# Altium PCB RES-001 AutoHAT V2 SD Adapter Sub-Board - PCB.PcbDoc
Units mil, origin at the board's own origin, x right, y up, seen from the top; angles counter-clockwise.
Board outline 2086.61 x 787.4 mil, 4 copper layers (GTL, G1, GP1, GBL), stack 30.709 mil thick; 50 components, 45 nets, 229 pads, 73 vias.
Unrouted connection lines stored in the file: 1.
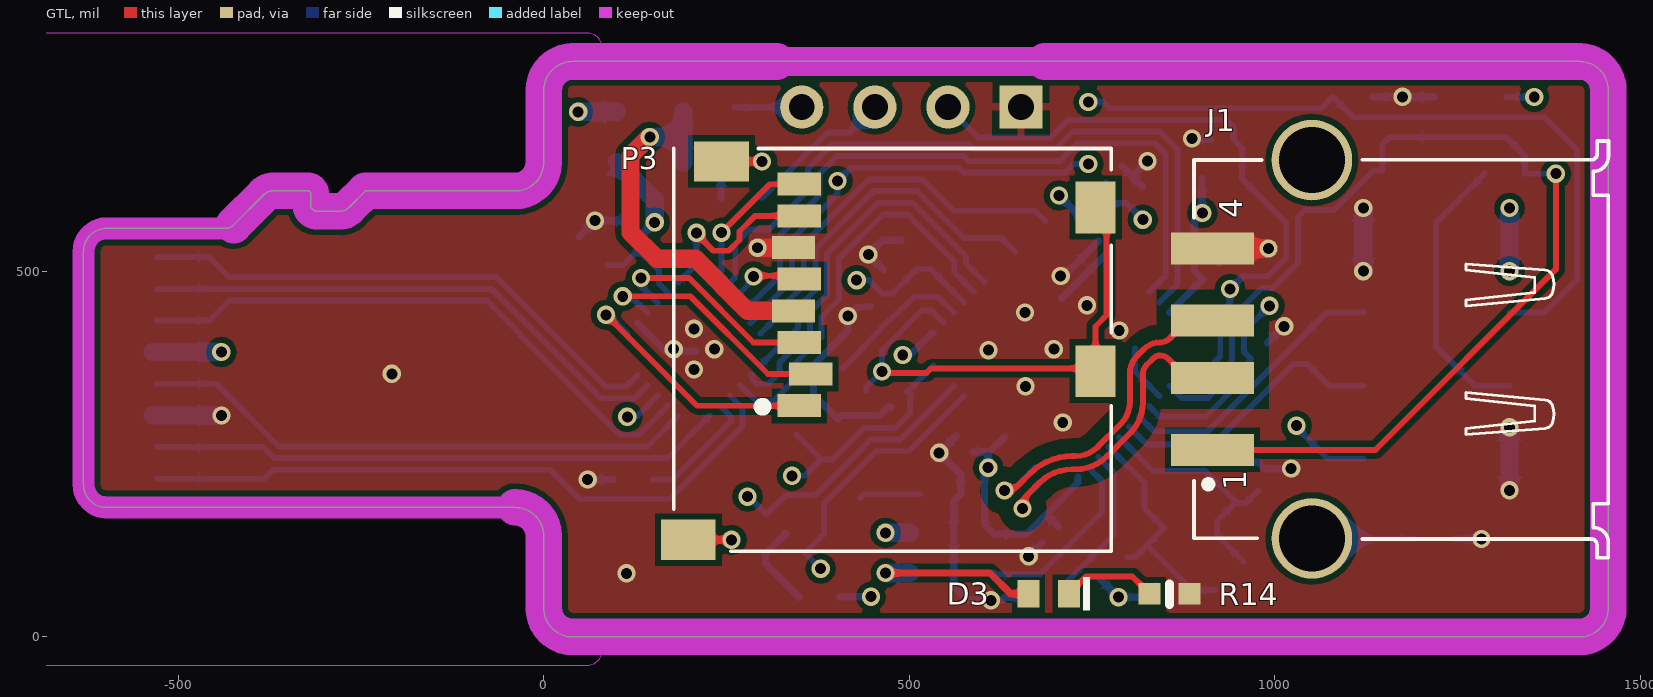
[diagram p0: GTL view]
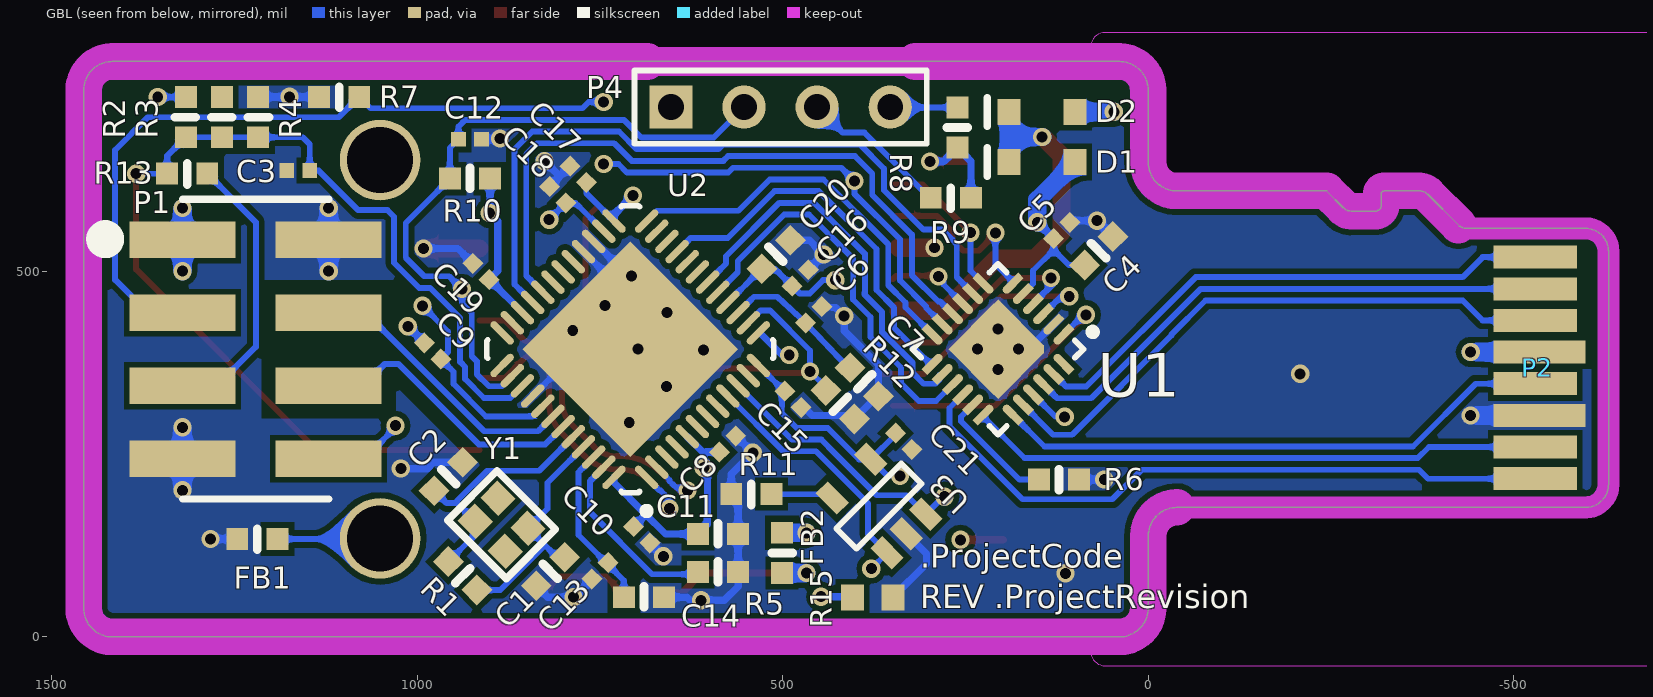
[diagram p1: GBL view, seen from below]
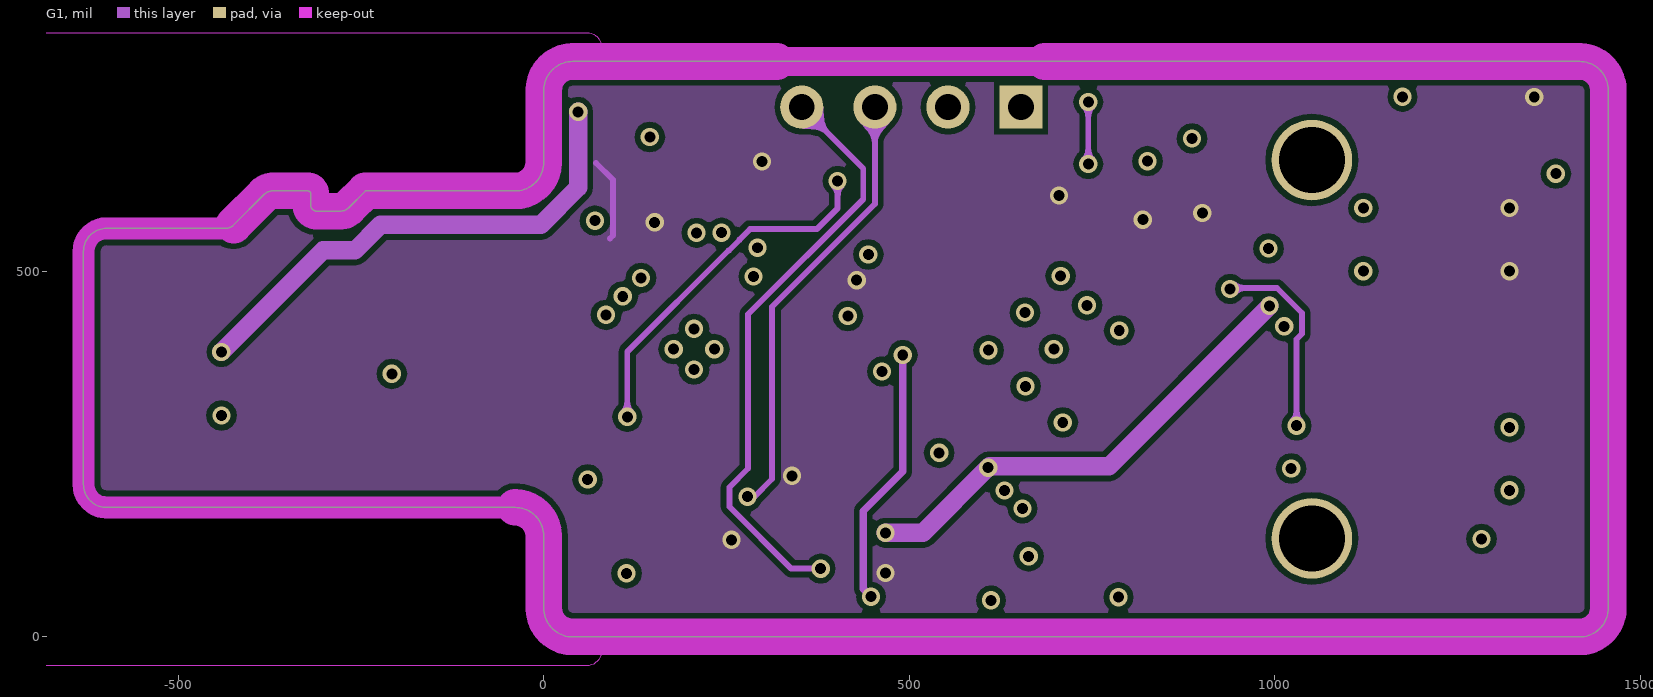
[diagram p2: G1]
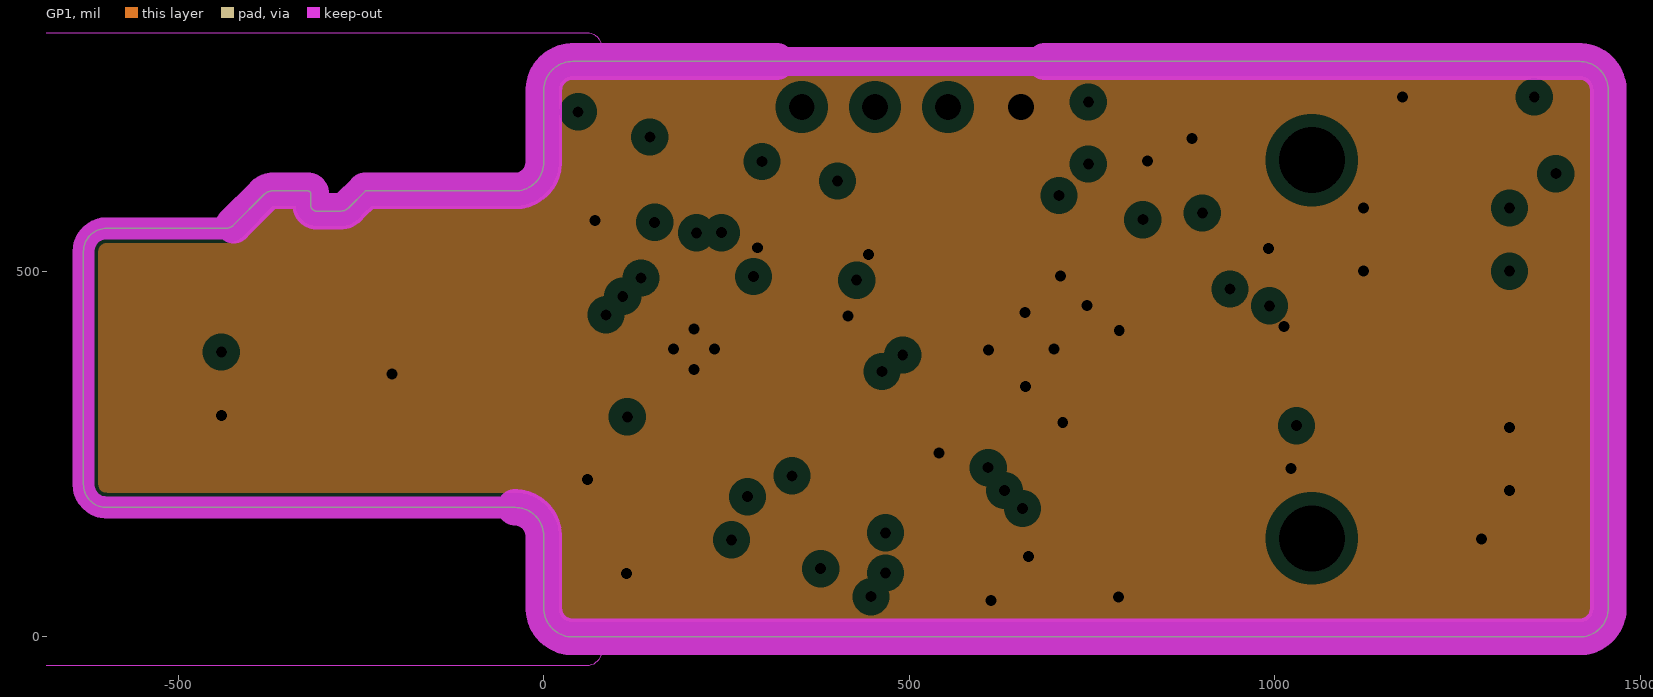
[diagram p3: GP1, clearances drawn from the general rule]
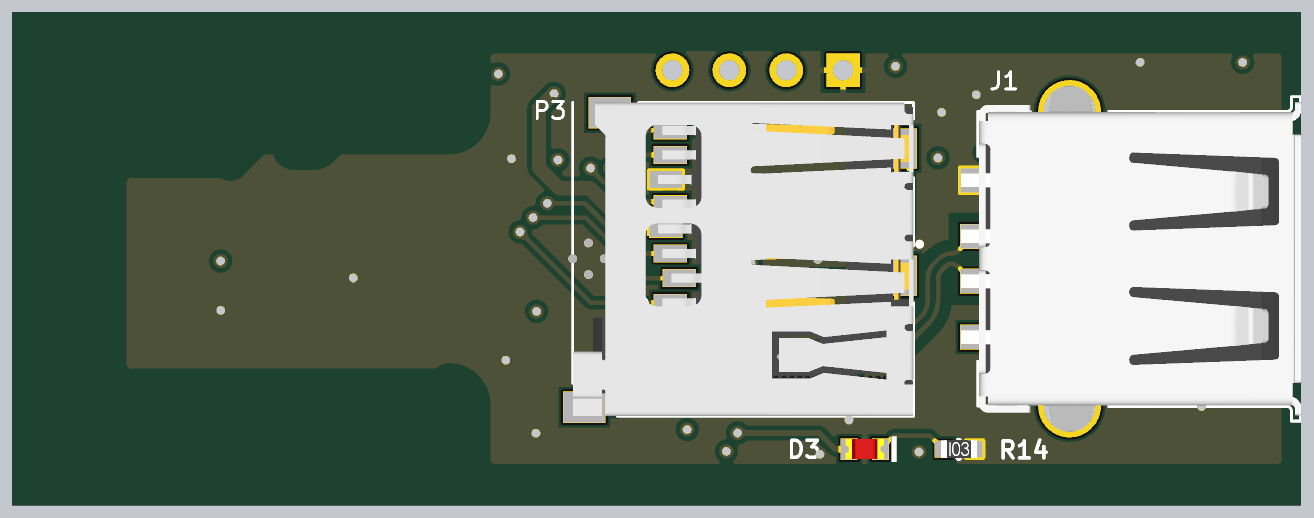
[diagram p4: 3D render of the assembled board from above, using the file's embedded part models]
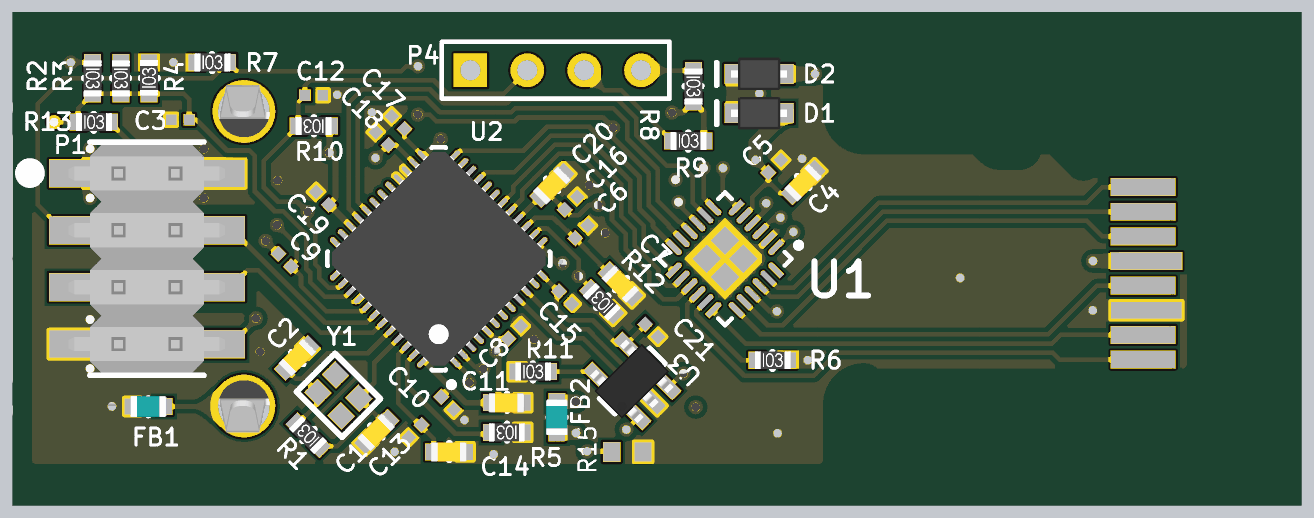
[diagram p5: 3D render of the assembled board from below, using the file's embedded part models]

## Layer stack, top to bottom
GTS: solder mask 0.3937, Solder Resist, Dk 3.5
GTL: signal copper 1.378
Dielectric 1: prepreg 4.7244, Prepreg, Dk 4.2
G1: signal copper 1.378
Dielectric 2: core 15.748, Prepreg, Dk 4.2
GP1: plane copper 1.378, net GND
Dielectric 3: prepreg 4.7244, FR-4, Dk 4.2
GBL: signal copper 1.378
GBS: solder mask 0.3937, Solder Resist, Dk 3.5

## Board outline
-598.43,177.17 cw(c-598.43,208.66) -629.92,208.66 -629.92,527.56 cw(c-598.43,527.56) -598.43,559.06 -435.66,559.06 -435.66,559.05 ccw(c-435.66,574.8) -424.53,563.66 -382.57,605.62 -382.57,605.63 cw(c-371.44,594.49) -371.44,610.24 -322.83,610.24 cw(c-322.83,606.3) -318.9,606.3 -318.9,590.55 ccw(c-311.02,590.55) -311.02,582.68 -278.19,582.68 -278.19,582.67 ccw(c-278.19,598.42) -267.05,587.28 -244.09,610.24 -39.37,610.24 ccw(c-39.37,649.61) 0,649.61 0,748.03 cw(c39.37,748.03) 39.37,787.4 1417.32,787.4 cw(c1417.32,748.03) 1456.69,748.03 1456.69,39.37 cw(c1417.32,39.37) 1417.32,0 39.37,0 cw(c39.37,39.37) 0,39.37 0,137.8 ccw(c-39.37,137.8) -39.37,177.17
cut-out: 1417.32,787.4
cut-out: -787.4,-39.37 cw(c-787.4,-19.69) -807.09,-19.69 cw(c-787.4,-19.69) -787.4,0 ccw(c-787.4,39.37) -748.03,39.37 -748.03,748.03 ccw(c-787.4,748.03) -787.4,787.4 cw(c-787.4,807.09) -807.09,807.09 cw(c-787.4,807.09) -787.4,826.77 59.06,826.77 cw(c59.06,807.09) 78.74,807.09 cw(c59.06,807.09) 59.06,787.4 39.37,787.4 ccw(c39.37,748.03) 0,748.03 0,649.61 cw(c-39.37,649.61) -39.37,610.24 -244.09,610.24 -267.05,587.28 cw(c-278.19,598.42) -278.19,582.67 -278.19,582.68 -311.02,582.68 cw(c-311.02,590.55) -318.9,590.55 -318.9,606.3 ccw(c-322.83,606.3) -322.83,610.24 -371.44,610.24 ccw(c-371.44,594.49) -382.57,605.63 -382.57,605.62 -424.53,563.66 cw(c-435.66,574.8) -435.66,559.05 -435.66,559.06 -598.43,559.06 ccw(c-598.43,527.56) -629.92,527.56 -629.92,208.66 ccw(c-598.43,208.66) -598.43,177.17 -39.37,177.17 cw(c-39.37,137.8) 0,137.8 0,39.37 ccw(c39.37,39.37) 39.37,0 59.06,0 cw(c59.06,-19.68) 78.74,-19.68 78.74,-19.69 cw(c59.06,-19.69) 59.06,-39.37

## Design rules (kind name [scope] priority, off if disabled: settings)
Clearance Clearance_1 [InNet('USBUP_D_P') or InNet('USBUP_D_N') or InNet('USBDN_D2_P') or InNet('USBDN_D2_N') vs InNet('GND')] p1: gap=8 ignorepadtopadclearanceinfootprint=FALSE except(0: Arc-Hole Track-Hole SMDPad-Hole THPad-Hole Via-Hole Fill-Hole Poly-Hole Region-Hole Text-Hole; 20: Arc-Poly Track-Poly SMDPad-Poly THPad-Poly Via-Poly Fill-Poly Poly-Poly)
Clearance [All] p2: gap=8 ignorepadtopadclearanceinfootprint=FALSE except(0: Arc-Hole Track-Hole SMDPad-Hole THPad-Hole Via-Hole Fill-Hole Poly-Hole Region-Hole Text-Hole)
DiffPairsRouting [All] p1: maxlimit=10 minlimit=10 mostfreqgap=10 toplayer_minwidth=8 toplayer_maxwidth=15 toplayer_prefwidth=10 midlayer1_minwidth=15 midlayer1_maxwidth=15 midlayer1_prefwidth=15 bottomlayer_minwidth=8 bottomlayer_maxwidth=15 bottomlayer_prefwidth=10 maxuncoupledlength=500
HoleSize [All] p1: absolutevalues=TRUE maxlimit=500 minlimit=15 maxpercent=80.000 minpercent=20.000
MinimumAnnularRing [All] p1: minimumring=5
MinimumSolderMaskSliver [All] p1: minsoldermaskwidth=2
PasteMaskExpansion [All] p1: expansion=-1
PlaneClearance [All] p1: clearance=18
PlaneConnect PlaneConnect_1 [IsPad and OnMultiLayer] p1: planeconnectstyle=Relief reliefexpansion=20 reliefentries=4 reliefconductorwidth=12 reliefairgap=10
PlaneConnect [All] p2: planeconnectstyle=Direct reliefexpansion=20 reliefentries=4 reliefconductorwidth=10 reliefairgap=10
PolygonConnect [All vs IsPad and OnMultiLayer] p1: connectstyle=Relief reliefconductorwidth=10 reliefentries=4 polygonreliefangle="90 Angle" airgapwidth=10
PolygonConnect PolygonConnect_1 [All] p2: connectstyle=Direct reliefconductorwidth=10 reliefentries=4 polygonreliefangle="90 Angle" airgapwidth=10
RoutingVias [All] p1: holewidth=15 width=25 viastyle="Through Hole" minholewidth=15 minwidth=25 maxholewidth=25 maxwidth=50
SilkToSilkClearance [All] p1 off: silktosilkclearance=1
SilkToSolderMaskClearance [IsPad] p1: minsilkscreentomaskgap=1 clearancetoexposedcopper=TRUE
SolderMaskExpansion [All] p1: expansion=4
Width [All] p1: maxlimit=500 minlimit=8 preferedwidth=10 midlayer1_maxwidth=100 minimp=50.000000 maximp=50.000000 favimp=50.000000
22 further rules are at their usual default settings.

## Classes and differential pairs
differential pair USBUP_D: +USBUP_D_P -USBUP_D_N
differential pair USBDN_D2: +USBDN_D2_P -USBDN_D2_N

## Components (designator, comment, footprint, x,y, rotation, side; value= is the part's Value field where it differs from the comment)
C1 "18pF" "0603C - HD" 817.91,89.57 r315 bottom
C2 "18pF" "0603C - HD" 957.68,219.49 r135 bottom
C3 "100nF" 0402 1163,638 r180 bottom
C4 "1µF" "0603C - HD" 67.61,528.29 r315 bottom
C5 "100nF" 0402 118.11,556.1 r315 bottom
C6 "100nF" 0402 457.68,440.94 r315 bottom
C7 "1µF" "0603C - HD" 388.46,348.76 r45 bottom
C8 "100nF" 0402 575.48,264.09 r315 bottom
C9 "100nF" 0402 979.12,391.33 r225 bottom
C10 "100nF" 0402 692.91,139.76 r45 bottom
C11 "4.7µF" "0603C - HD" 588.58,140.75 r0 bottom
C12 "100nF" 0402 928,681 r0 bottom
C13 "100nF" 0402 750,90.55 r135 bottom
C14 "1µF" "0603C - HD" 690,54.32 r0 bottom
C15 "100nF" 0402 486,325.32 r45 bottom
C16 "100nF" 0402 476,491.32 r315 bottom
C17 "100nF" 0402 780,633 r225 bottom
C18 "100nF" 0402 808,605 r225 bottom
C19 "100nF" 0402 913,500 r225 bottom
C20 "4.7µF" "0603C - HD" 509,523.32 r315 bottom
C21 "100nF" 0402 334.44,267.77 r45 bottom
D1 "CUS08F30,H3F" USC 145.32,649.61 r0 bottom
D2 "CUS08F30,H3F" USC 145.32,718.5 r0 bottom
D3 "" "0603LED - HD" 690.94,59.06 r0 top value="Green LED"
FB1 "300mA" "0603L - HD" 1219,134 r180 bottom
FB2 "2A 0.05 DCR" "0603L - HD" 501,115 r90 bottom
J1 "WE-Communication Connectors 62900416021" 62900416021 1456.69,394.68 r90 top locked
P1 "15-91-0080" 15-91-0080 1221.46,393.7 r270 bottom locked
P2 "SD Card Adapter Connector" "SD Card" -529.53,368.11 r270 bottom locked
P3 "Wurth MicroSD" 693071010811 476.38,391.73 r90 top locked value=693071010811
P4 "Header 4" HDR1X4 653,725 r180 bottom locked
R1 "1M" "0603R - HD" 937.99,83.66 r45 bottom
R2 "825R" "0603R - HD" 1316.89,711.24 r270 bottom
R3 "39.2k" "0603R - HD" 1267.43,711.24 r270 bottom
R4 "61.9k" "0603R - HD" 1217.81,711.24 r90 bottom
R5 "12k" "0603R - HD" 588.58,88.58 r0 bottom
R6 "10k" "0603R - HD" 122,215.32 r180 bottom
R7 "10k" "0603R - HD" 1107,739 r180 bottom
R8 "2k" "0603R - HD" 261,697 r270 bottom
R9 "2k" "0603R - HD" 270,601 r180 bottom
R10 "10k" "0603R - HD" 928,627 r0 bottom
R11 "10k" "0603R - HD" 543,195.32 r180 bottom
R12 "10k" "0603R - HD" 421.46,317.76 r45 bottom
R13 "0R" "0603R - HD" 1315,634 r180 bottom
R14 "470R" "0603R - HD" 856.3,59.09 r0 top
R15 "10k" 1608[0603] 376.97,54.13 r180 bottom
U1 "TS3A27518ERTWR" QFN-24 205.43,393.7 r315 bottom
U2 "USB2642-I/ML" QFN48 708.66,393.7 r45 bottom locked
U3 "FT24C04A-ULR-T" SOT-23-5 368.46,178.96 r45 bottom
Y1 "24MHz" "XTAL - 2 x 1.6" 884.84,153.54 r45 bottom

## Footprints (in the part's own frame and the unit in brackets; to place one, negate y for a bottom-side part, rotate by r counter-clockwise, add the part's x,y. Pads: shape width x height; smd on the part's side, far side on the other; paste and mask are expansions set on the pad)
15-91-0080 [mil]
  rect 50x145 smd: 1(-150,-100) 2(-150,100) 3(-50,-100) 4(-50,100) 5(50,-100) 6(50,100) 7(150,-100) 8(150,100)
  silkscreen extent -205,-216 205,100, body extent -200,-137 200,138, height 379
0402 [mm] "Chip Capacitor, Body 1.0x0.5mm, Height 0.6mm, IPC High Density"
  rect 0.52x0.52 smd: 1(-0.4,0) 2(0.4,0)
  body extent -0.55,-0.3 0.55,0.3, height 0.6
"0603C - HD" [mil] "Capacitor 0603 [Imperial]"
  rect 30x30 smd: 1(-27.5,0) 2(27.5,0)
  silkscreen extent 0,-15 0,14, body extent -31,-17 32,17, height 31
"0603L - HD" [mil] "Inductor 0603 [Imperial]"
  rect 30x30 smd: 1(-27.5,0) 2(27.5,0)
  silkscreen extent 0,-15 0,14, body extent -31,-19 31,19, height 31
"0603LED - HD" [mil] "LED 0603 [Imperial]"
  rect 30x38 smd: 1(-27.5,0) 2(27.5,0)
  silkscreen extent 47,-23 56,23, body extent -33,-18 33,18, height 35
"0603R - HD" [mil] "Resistor 0603 [Imperial]"
  rect 30x30 smd: 1(-27.5,0) 2(27.5,0)
  silkscreen extent 0,-15 0,14, body extent -31,-16 32,16, height 18
1608[0603] [mm] "Chip Capacitor, Body 1.6x0.8mm, IPC High Density"
  rect 0.8x0.9 smd: 1(-0.7,0) 2(0.7,0)
  body extent -0.87,-0.48 0.87,0.48, height 1.3
62900416021 [mm] "4 pins"
  rect 1.12x2.88 smd: 1(-3.525,13.755) 2(-1.025,13.755) 3(0.975,13.755) 4(3.475,13.755)
  round 2.8 hole 2.3: Z1(-6.6,10.305) Z2(6.55,10.305)
  silkscreen extent -7.28,0 7.21,14.4, body extent -7.77,-0.05 7.72,15.16, height 7.5
693071010811 [mm] "WR-CRD Micro SD_Push and Push_Card Detection_8 pins"
  rect 0.8x1.5 smd: 1(-1.915,3.225) 2(-0.815,2.825) 3(0.285,3.225) 4(1.385,3.425) 5(2.485,3.225) 6(3.585,3.425) 7(4.685,3.225) 8(5.785,3.225)
  rect 1.4x1.9 smd: 9(-6.575,7.075) 9(6.575,5.925)
  rect 1.8x1.4 smd: 10(-0.715,-7.075) 10(4.975,-7.075)
  silkscreen extent -6.98,-7.62 7.03,7.59, body extent -6.97,-7.63 7.03,7.58, height 1.84
HDR1X4 [mm] "Connector; Header; 4 Position"
  rect 1.5x1.5 hole 0.9: 1(0,0)
  round 1.5 hole 0.9: 2(2.54,0) 3(5.08,0) 4(7.62,0)
  silkscreen extent -1.27,-1.27 8.89,1.27
QFN48 [mm]
  oval 1.05x0.25 smd paste-0.025 mask+0.1: 1(-3.55,2.75) 2(-3.55,2.25) 3(-3.55,1.75) 4(-3.55,1.25) 5(-3.55,0.75) 6(-3.55,0.25) 7(-3.55,-0.25) 8(-3.55,-0.75) 9(-3.55,-1.25) 10(-3.55,-1.75) 11(-3.55,-2.25) 12(-3.55,-2.75) 25(3.55,-2.75) 26(3.55,-2.25) 27(3.55,-1.75) 28(3.55,-1.25) 29(3.55,-0.75) 30(3.55,-0.25) 31(3.55,0.25) 32(3.55,0.75) 33(3.55,1.25) 34(3.55,1.75) 35(3.55,2.25) 36(3.55,2.75)
  oval 0.25x1.05 smd paste-0.025 mask+0.1: 13(-2.75,-3.55) 14(-2.25,-3.55) 15(-1.75,-3.55) 16(-1.25,-3.55) 17(-0.75,-3.55) 18(-0.25,-3.55) 19(0.25,-3.55) 20(0.75,-3.55) 21(1.25,-3.55) 22(1.75,-3.55) 23(2.25,-3.55) 24(2.75,-3.55) 37(2.75,3.55) 38(2.25,3.55) 39(1.75,3.55) 40(1.25,3.55) 41(0.75,3.55) 42(0.25,3.55) 43(-0.25,3.55) 44(-0.75,3.55) 45(-1.25,3.55) 46(-1.75,3.55) 47(-2.25,3.55) 48(-2.75,3.55)
  rect 5.3x5.3 smd paste-10: PAD(0,0)
  silkscreen extent -4.5,-3.72 3.72,3.73, body extent -3.62,-3.63 3.63,3.63, height 1
QFN-24 [mm]
  rect 0.282x0.282 smd rot 45 paste-10 mask+0: 0(-1.026,1.026)
  rect 2.45x2.25 smd paste-10 mask+0: 0(0,-0.1)
  rect 2.25x2.45 smd paste-10 mask+0: 0(0.1,0)
  rect 0.7x0.28 smd paste-0.025 mask+0.08: 1(-2.025,1.25) 2(-2.025,0.75) 3(-2.025,0.25) 4(-2.025,-0.25) 5(-2.025,-0.75) 6(-2.025,-1.25) 13(2.025,-1.25) 14(2.025,-0.75) 15(2.025,-0.25) 16(2.025,0.25) 17(2.025,0.75) 18(2.025,1.25)
  round 0.28 smd mask+0.08: 1(-1.675,1.25) 2(-1.675,0.75) 3(-1.675,0.25) 4(-1.675,-0.25) 5(-1.675,-0.75) 6(-1.675,-1.25) 7(-1.25,-1.675) 8(-0.75,-1.675) 9(-0.25,-1.675) 10(0.25,-1.675) 11(0.75,-1.675) 12(1.25,-1.675) 13(1.675,-1.25) 14(1.675,-0.75) 15(1.675,-0.25) 16(1.675,0.25) 17(1.675,0.75) 18(1.675,1.25) 19(1.25,1.675) 20(0.75,1.675) 21(0.25,1.675) 22(-0.25,1.675) 23(-0.75,1.675) 24(-1.25,1.675)
  rect 0.28x0.7 smd paste-0.025 mask+0.08: 7(-1.25,-2.025) 8(-0.75,-2.025) 9(-0.25,-2.025) 10(0.25,-2.025) 11(0.75,-2.025) 12(1.25,-2.025) 19(1.25,2.025) 20(0.75,2.025) 21(0.25,2.025) 22(-0.25,2.025) 23(-0.75,2.025) 24(-1.25,2.025)
  silkscreen extent -2.85,-2.1 2.1,2.1, body extent -1.1,-3 2.9,1, height 0.9
"SD Card" [mm]
  rect 0.8x2.9 smd: 1(-3.85,0) 2(-2.75,0) 3(-1.65,0) 5(0.55,0) 7(2.75,0) 8(3.85,0)
  rect 0.8x3.2 smd: 4(-0.55,0.15) 6(1.65,0.15)
SOT-23-5 [mm]
  rect 1.05x0.6 smd: 1(-1.35,0.95) 2(-1.35,0) 3(-1.35,-0.95) 4(1.35,-0.95) 5(1.35,0.95)
  silkscreen extent -0.5,-1.6 0.5,1.6, body extent -1.5,-1.47 1.5,1.53, height 1.45
USC [mm]
  rect 0.8x0.9 smd: 1(-1.15,0) 2(1.15,0)
  silkscreen extent 1.9,-0.5 1.9,0.5, body extent -1.25,-0.73 1.25,0.72, height 1.1
"XTAL - 2 x 1.6" [mm]
  rect 0.9x0.85 smd: 1(-0.737,-0.562) 2(-0.737,0.562) 2(0.738,-0.562) 3(0.738,0.563)
  silkscreen extent -1.44,-1.21 1.44,1.21, body extent -1.01,-0.81 0.99,0.79, height 0.7

## Part data
C1 C2: library part WARDIND3.S01_1uF_14, "18pF ±5% 100V Ceramic Capacitor C0G, NP0 0603 (1608 Metric)", Manufacturer="Samsung Electro-Mechanics America, Inc", Manufacturer Part No.=CL10C180JC8NNNC, Package=0603, Rating=100V, Supplier Part No.=1276-2210-1-ND, Checked=YES, Checked_Date=2017.06.26, Cost_1=0.10000, Cost_100=0.02460, Cost_1000=0.01353, Load=YES, Mount=SMT, Supplier=Digi-Key
C3 C5 C6 C8 C9 C10 C12 C13 C15 C16 C17 C18 C19 C21: library part Cap, "0.10µF 16V Ceramic Capacitor X7R 0402 (1005 Metric) 0.039\" L x 0.020\" W (1.00mm x 0.50mm)", Manufacturer="Samsung Electro-Mechanics America, Inc", Manufacturer Part No.=CL05B104KO5NNNC, Package=0402, Rating=16V, Supplier Part No.=1276-1001-1-ND, Checked=YES, Checked_Date=2017.06.26, Cost_1=0.10000, Cost_100=0.00500, Cost_1000=0.00308, Load=YES, Mount=SMT, Supplier=Digi-Key
C4 C7 C14: library part Cap, "1µF 10V Ceramic Capacitor X7R 0603 (1608 Metric) 0.063\" L x 0.031\" W (1.60mm x 0.80mm)", Manufacturer="Samsung Electro-Mechanics America, Inc", Manufacturer Part No.=CL10B105KP8NNNC, Package=0603, Rating=10V, Supplier Part No.=1276-1946-1-ND, Checked=YES, Checked_Date=2017.06.26, Cost_1=0.10000, Cost_100=0.01870, Cost_1000=0.01070, Mount=SMT, Supplier=Digi-Key
  C4: Load=DNP
  C7 C14: Load=YES
C11 C20: library part Cap, "4.7µF 10V Ceramic Capacitor X5R 0603 (1608 Metric) 0.063\" L x 0.031\" W (1.60mm x 0.80mm)", Manufacturer="Samsung Electro-Mechanics America, Inc", Manufacturer Part No.=CL10A475KP8NNNC, Package=0603, Rating=10V, Supplier Part No.=1276-1044-1-ND, Checked=YES, Checked_Date=2017.06.26, Cost_1=0.12000, Cost_100=0.04320, Cost_1000=0.02756, Load=YES, Mount=SMT, Supplier=Digi-Key
D1 D2: library part "D Schottky", "Schottky Diode", Manufacturer="Toshiba Semiconductor and Storage", Rating=800mA, Supplier Part No.=CUS08F30H3FCT-ND, Cost_1=0.37000, Cost_100=0.18900, Load=YES, Manufacturer Part No.=CUS08F30,H3F, Mount=SMT, Supplier=Digi-Key
D3: library part LED1, "Green 571nm LED Indication - Discrete 2V 0603 (1608 Metric)", Manufacturer="Lite-On Inc.", Manufacturer Part No.=LTST-C190KGKT, Package=0603, Rating="25mA DC", Supplier Part No.=160-1435-1-ND, Checked=YES, Checked_Date=2017.06.23, Cost_1=0.28000, Cost_100=0.10750, Cost_1000=0.05054, Load=YES, Mount=SMT, Supplier=Digi-Key
FB1: library part Inductor, "470 Ohm 1 Ferrite Bead 0603 (1608 Metric) 300mA 350 mOhm Max DCR", Manufacturer="Samsung Electro-Mechanics America, Inc", Manufacturer Part No.=CIM10J471NC, Package=0603, Supplier Part No.=1276-6380-1-ND, Checked=YES, Checked_Date=2017.06.26, Cost_1=0.10000, Cost_100=0.02940, Cost_1000=0.01108, Load=YES, Mount=SMT, Rating=300mA, Supplier=Digi-Key
FB2: library part Inductor, "Inductor", Manufacturer="TDK Corporation", Manufacturer Part No.=MPZ1608S181ATAH0, Package=0603, Supplier Part No.=445-5220-1-ND, Checked=YES, Checked_Date=2017.06.26, Cost_1=0.10000, Cost_100=0.04720, Cost_1000=0.02826, Load=YES, Mount=SMT, Rating="2A 0.05 DCR", Supplier=Digi-Key
J1: "WR-COM USB SMT Type A", Manufacturer="W¨¹rth Elektronik eiSos GmbH", Manufacturer Part No.=62900416021, Supplier Part No.=732-3181-ND, Checked=YES, Checked_Date=2017.06.26, Cost_1=2.63000, Cost_100=2.21330, Cost_1000=1.84503, Load=YES, Mount=SMT, Supplier=Digi-Key
P1: library part "Header 4X2", "Header, 4-Pin, Dual row", Manufacturer="Molex, LLC", Supplier Part No.=WM17458-ND, Cost_1=0.77000, Cost_100=0.58500, Cost_1000=0.42548, Load=YES, Manufacturer Part No.=15-91-0080, Mount=SMT, Supplier=Digi-Key
P3: library part "Molex MicroSD", Manufacturer=Wurth, Manufacturer Part No.=693071010811, Checked=YES, Checked_Date=2017.06.26, Load=YES, Mount=SMT, Supplier=Wurth, Supplier Part No.=693071010811
P4: "Header, 4-Pin"
R1: library part Res1, "RES SMD 1M OHM 5% 1/10W 0603", Manufacturer="Samsung Electro-Mechanics America, Inc", Manufacturer Part No.=RC1608J105CS, Package=0603, Rating=0.1W, Supplier Part No.=1276-5134-1-ND, Checked=YES, Checked_Date=2017.06.26, Cost_1=0.10000, Cost_100=0.00600, Cost_1000=0.00391, Load=YES, Mount=SMT, Supplier=Digi-Key
R2: library part Res1, "825 Ohm ±1% 0.1W, 1/10W Chip Resistor 0603 (1608 Metric) Moisture Resistant Thick Film", Manufacturer=Yageo, Manufacturer Part No.=RC0603FR-07825RL, Package=0603, Rating="1% 0.1W", Supplier Part No.=311-825HRCT-ND, Checked=YES, Checked_Date=2017.06.26, Cost_1=0.11000, Cost_100=0.00670, Cost_1000=0.00298, Load=DNP, Mount=SMT, Precision=1%, Supplier=Digi-Key
R3: library part Res1, "39.2k Ohm ±1% 0.1W, 1/10W Chip Resistor 0603 (1608 Metric) Moisture Resistant Thick Film", Manufacturer=Yageo, Manufacturer Part No.=RC0603FR-0739K2L, Package=0603, Rating="1% 0.1W", Supplier Part No.=311-39.2KHRCT-ND, Checked=YES, Checked_Date=2017.06.26, Cost_1=0.11000, Cost_100=0.00670, Cost_1000=0.00298, Load=DNP, Mount=SMT, Precision=1%, Supplier=Digi-Key
R4: library part Res1, "39.2k Ohm ±1% 0.1W, 1/10W Chip Resistor 0603 (1608 Metric) Moisture Resistant Thick Film", Manufacturer=Yageo, Manufacturer Part No.=RC0603FR-0761K9L, Package=0603, Rating="1% 0.1W", Supplier Part No.=311-61.9KHRCT-ND, Checked=YES, Checked_Date=2017.06.26, Cost_1=0.11000, Cost_100=0.00670, Cost_1000=0.00298, Load=YES, Mount=SMT, Precision=1%, Supplier=Digi-Key
R5: library part Res1, "12k Ohm ±1% 0.1W, 1/10W Chip Resistor 0603 (1608 Metric) Moisture Resistant Thick Film", Manufacturer=Yageo, Manufacturer Part No.=RC0603FR-0712KL, Package=0603, Rating="1% 0.1W", Supplier Part No.=311-12.0KHRTR-ND, Checked=YES, Checked_Date=2017.06.22, Cost_1=0.11000, Cost_100=0.00670, Cost_1000=0.00298, Load=YES, Mount=SMT, Precision=1%, Supplier=Digi-Key
R6 R7 R10 R11 R12 R15: library part Res1, "RES SMD 10K OHM 5% 1/10W 0603", Manufacturer="Samsung Electro-Mechanics America, Inc", Manufacturer Part No.=RC1608J103CS, Package=0603, Rating=0.1W, Supplier Part No.=1276-5086-1-ND, Checked=YES, Checked_Date=2017.06.26, Cost_1=0.13000, Cost_100=0.01210, Cost_1000=0.00391, Load=YES, Mount=SMT, Supplier=Digi-Key
R8 R9: library part Res1, "RES SMD 2K OHM 5% 1/10W 0603", Manufacturer=Yageo, Manufacturer Part No.=RC0603JR-072KL, Package=0603, Rating=0.1W, Supplier Part No.=311-2.0KGRCT-ND, Checked=YES, Checked_Date=2017.06.26, Cost_1=0.10000, Cost_100=0.00420, Load=YES, Mount=SMT, Supplier=Digi-Key
R13: library part Res1, "RES SMD 0 OHM JUMPER", Manufacturer="Samsung Electro-Mechanics America, Inc", Manufacturer Part No.=RC1608J000CS, Package=0603, Rating=0.1W, Supplier Part No.=1276-3510-1-ND, Checked=YES, Checked_Date=2017.06.23, Cost_1=0.10000, Cost_100=0.00440, Cost_1000=0.00322, Load=YES, Mount=SMT, Supplier=Digi-Key
R14: library part Res1, "RES SMD 470 OHM 5% 1/10W 0603", Manufacturer="Samsung Electro-Mechanics America, Inc", Manufacturer Part No.=RC1608J471CS, Package=0603, Rating=0.1W, Supplier Part No.=1276-5054-1-ND, Checked=YES, Checked_Date=2017.06.23, Cost_1=0.10000, Cost_100=0.00460, Cost_1000=0.00391, Load=YES, Mount=SMT, Supplier=Digi-Key
U1: library part TS3A27518E, "IC MUX/DEMUX 6X1 24WQFN", Manufacturer="Texas Instruments", Package=24-WQFN, Supplier Part No.=296-25415-1-ND, Cost_1=2.56000, Cost_100=1.84820, Cost_1000=1.25813, Load=YES, Manufacturer Part No.=TS3A27518ERTWR, Mount=SMT, Supplier=Digi-Key
U2: library part USB2642, "IC FLASH MEDIA CTLR USB2 48VQFN", Manufacturer="Microchip Technology", Package=48-QFN, Supplier Part No.=USB2642-I/ML-ND, Checked=YES, Checked_Date=2017.06.26, Cost_1=5.09000, Cost_100=4.09740, Load=YES, Manufacturer Part No.=USB2642-I/ML, Mount=SMT, Supplier=Digi-Key
U3: "EEPROM Memory IC 4Kb (512 x 8) I²C 550ns SOT-23-5", Manufacturer="Fremont Micro Devices USA", Package=SOT-23-5, Supplier Part No.=1219-1066-1-ND, Checked=YES, Checked_Date=2017.06.26, Cost_1=0.48000, Cost_100=0.30500, Cost_1000=0.18184, Load=YES, Manufacturer Part No.=FT24C04A-ULR-T, Mount=SMT, Supplier=Digi-Key
Y1: library part XTAL, "24MHz ±20ppm Crystal 6pF 150 Ohm -30°C ~ 85°C Surface Mount 4-SMD, No Lead", Manufacturer="Murata Electronics North America", Manufacturer Part No.=XRCGB24M000F2P00R0, Supplier Part No.=490-9762-1-ND, Checked=YES, Checked_Date=2017.06.26, Cost_1=0.42000, Cost_100=0.27800, Cost_1000=0.22239, Load=YES, Mount=SMT, Supplier=Digi-Key

## Via types
v1: diameter 25, hole 15, GTL to GBL, tented both sides, 72 vias
v2: diameter 25, hole 15, GTL to GBL, 1 vias

## Nets (pads, with @x,y where several pads share a name; then routed paths per layer and width w, separated by ;. In a path a pad name is that pad's centre, name@x,y a point inside that pad or via, vN(x,y) a via of type N, cw(c..) or ccw(c..) an arc to the next point about the centre after c; other vN are vias at no path point)
A3V3: C8.2 C9.2 C10.2 C11.2 FB2.2 U2.5 U2.41 U2.48 | length 1312.8
  G1 w25: v1(467.5,142.5) 518.93,142.5 v1(608,231.57) 609.92,233.49 773.49,233.49 v1(993,453)
  GBL w8: U2.41 842.51,301.61 906,301.61 950.64,346.26 950.64,362.86 C9.2 958,390.18 958,418 v1(993,453)
  GBL w10: C8.2 609.67,252.95 U2.5 ; 608,251.28 v1(608,231.57) 603,226.57 603,153.83 C11.2 660.43,140.75 687.99,168.31 ; C10.2 687.99,166.96 687.99,168.31 ; U2.48 730.93,211.25 687.99,168.31
  GBL w25: v1(467.5,142.5) FB2.2
D1V8: C6.2 C7.2 U2.15 | length 202.6
  GBL w8: C7.2 410.16,368.2 C6.2 507.54,465.58 539.35,465.58 U2.15
D3V3: C4.2 C5.2 C15.2 C16.2 C17.2 C18.2 C19.2 C20.2 C21.2 D1.1 D3.1 FB2.1 P1.1 P3.9 R2.1 R8.2 R9.2 R10.1 U1.5 U2.12 U2.16 U2.25 U2.26 U2.34 U3.4 | length 1933.4
  GTL w10: P3.9@197.84,132.87 v1(256.87,132.87) ; P3.9@243.11,650.59 v1(298.41,650.59) ; v1(467.5,87.5) 610.56,87.5 639.01,59.06 D3.1
  G1 w8: 71.5,648.58 94.5,625.57 94.5,549.22 90.55,545.28
  GBL w8: C4.2 108.51,508.85 129.25,529.59 ; v1(151.59,567.32) C5.2 129.25,529.59 ; U1.5@169.93,470.95 157.55,483.34 157.55,501.28 129.25,529.59 ; v1(339.44,220.46) 357.06,220.46 U3.4 ; C21.2@345.58,277.01 U3.4 ; v1(428.15,488.19) 444.81,488.19 463,470 476.96,470 C16.2 510.83,503.87 C20.2 528.9,503.87 U2.16 ; U2.12 498.3,336.45 C15.2 501.34,332.25 501.34,306.44 480.89,285.99 438.55,285.99 395.55,242.99 U3.4 ; U2.25 736.85,575 768.86,607.02 C17.2 ; U2.26 783.55,593.86 C18.2 v1(819.73,571) ; R2.1 v1(1355.26,738.74)
  GBL w10: R9.2 242.5,651 R8.2 279.91,650.59 v1(298.41,650.59) ; v1(705,604) 734,575 U2.25@736.85,575 ; U2.34 901.26,488.86 C19.2 890,500.73 890,569 v1(901,580) 900.5,580.5 R10.1
  GBL w25: D1.1 151.59,598.06 v1(151.59,567.32) ; v1(467.5,87.5) FB2.1 ; v1(1321.46,500.55) P1.1 v1(1321.46,586.86)
DUT_VOLTAGE: D2.1 P2.4 | length 832.3
  G1 w25: v1(-441.24,389.76) -302,529 -258.4,529 -223.4,564 -3.92,564 47,614.91 v1(47,718.5)
  GBL w25: P2.4 v1(-441.24,389.76) ; v1(47,718.5) D2.1
GND: C1.2 C2.2 C3.1 C4.1 C5.1 C6.1 C7.1 C8.1 C9.1 C10.1 C11.1 C12.1 C13.1 C14.1 C15.1 C16.1 C17.1 C18.1 C19.1 C20.1 C21.1 FB1.1 J1.4 P1.2 P1.7 P2.6 P3.6 P4.1 R4.2 R5.1 R6.2 R7.1 R11.1 R12.1 R14.2 R15.2 U1.0 U1.2 U2.27 U2.28 U2.40 U2.PAD U3.2 | length 2197.6
  GTL w10: v1@610,52 v1(612,50)
  GTL w25: v1(292.34,532.51) 341.17,532.51 P3.6 ; J1.4 v1(991.5,531.5)
  GBL w8: U2.PAD@808.88,395.09 808.88,363.08 U2.40
  GBL w10: C4.1 v1(70,569.58) 104.64,569.58 C5.1 ; v1(60,215.32) R6.2 ; U1.2@128.18,429.2 166.46,390.92 U1.0@208.22,390.92 ; U3.2@330,142.32 U3.2@330.83,142.32 ; U3.2 303.27,113.77 303.27,100.27 R15.2 ; C7.1 369.01,371.96 416,418.95 v1(416,439) 427.45,450.45 C6.1 ; C7.1@371.01,329.31 R12.1 406.69,302.99 459.48,302.99 470.68,314.18 C15.1 ; C16.1 v1(444,523.32) 463.45,542.76 C20.1 ; C8.1 v1(541,251.88) 570.5,222.38 R11.1 561.08,185.9 C11.1 R5.1 561.08,68.92 580,50 v1(612,50) 627,50 631.32,54.32 C14.1 ; v1(663.39,110.24) C10.1 ; U2.PAD@708.66,463.3 U2.28 ; U2.PAD@708.66,491.14 U2.27 ; C13.1 v1(786.24,54.32) 821.55,54.32 C1.2 ; C17.1 805,630.27 ; C18.1 805,630.27 ; v1(826,651) 805.27,630.27 805,630.27 ; v1(887,682) 888,681 C12.1 ; C19.1 944.5,531.5 v1(991.5,531.5) ; C2.2 977.83,238.93 986.45,230.32 v1(1022.64,230.32) ; C9.1 1012.78,425 v1(1013,425) ; R7.1 v1(1175,739) R4.2@1217.55,739 ; FB1.1 v1(1283,134)
  GBL w25: P2.6 -535.28,303 v1(-441,303) ; v1(1121.46,500.55) P1.2 v1(1121.46,586.86) ; v1(1321.46,200.55) P1.7 v1(1321.46,286.86)
  other v1: 113,87 710.05,293.48 659.25,342.89 -208,360 205.43,365.86 608.44,392.31 177.59,393.7 233.27,393.7 697.83,393.7 787.4,419.29 205.43,421.54 658.55,443.81 743.11,453.74 707.27,493.92
NetD1_2: D1.2 D2.2 P3.4 | length 523.8
  GTL w25: v1(145,684) 144,684 118.59,658.59 118.59,553.65 154.66,517.58 207.57,517.58 278.88,446.26 P3.4
  GBL w25: v1(145,684) 190.6,684 ; D1.2 190.6,684 ; D2.2 190.6,684
NetD3_2: D3.2 R14.1 | length 129.9
  GTL w8: D3.2 742.07,82.68 805.22,82.68 R14.1
NetFB1_2: FB1.2 J1.Z1 J1.Z2 | length 140.9
  GBL w8: J1.Z1 1051.82,134 FB1.2
NetP1_5: P1.5 R13.2 | length 387.1
  GBL w8: R13.2 1221,567.5 1221,396.91 1274.21,343.7 P1.5
NetR6_1: R6.1 U1.17 | length 167.2
  GBL w8: R6.1 176.25,215.32 256,295.06 256,301.37 U1.17@240.92,316.45
NetR11_2: R11.2 U3.5 | length 85.2
  GBL w8: U3.5 437.71,195.32 R11.2
NetR15_1: R15.1 U2.13 | length 455.9
  G1 w10: v1(447.83,55.12) 437.03,65.92 437.03,172.27 491.14,226.38 v1(491.14,385.83)
  GBL w10: R15.1 405.51,55.12 v1(447.83,55.12) ; v1(491.14,385.83) 500.98,385.83 531.13,415.97 U2.13
RBIAS: R5.2 U2.47 | length 253.4
  GBL w8: R5.2 618.93,85.74 678.91,85.74 763.62,170.44 763.62,213.47 U2.47
RESET_N: C12.2 P1.8 P4.2 R10.2 U2.38 | length 1294.3
  G1 w8: v1(939,476) 940.5,477.5 1003.15,477.5 1037.5,443.15 1037.5,414.85 1030,407.35 v1(1030,289)
  GBL w8: P4.2 594.53,683.47 693.47,683.47 717.5,707.5 934.5,707.5 943.75,698.25 C12.2 955.5,669.25 R10.2 1016,566.5 1016,519 990.5,493.5 956.5,493.5 v1(939,476) 938.69,475.69 938.69,456.31 925.5,443.13 925.5,384 918.64,377.14 918.64,359.51 902.13,343 884.64,343 U2.38 ; v1(1030,289) 1030,286.5 1072.8,243.7 P1.8
SCL: P4.4 R8.1 U2.9 U3.1 | length 1271.1
  G1 w8: P4.4 437,641 437,599 279.53,441.53 279.53,230.32 253.94,204.72 253.94,178.15 338.63,93.46 v1(378.8,93.46)
  GBL w8: R8.1 352.5,724.5 P4.4 ; v1(378.8,93.46) U3.1 383.44,141.05 383.44,182.77 454.66,253.99 499.35,253.99 U2.9
SD_CLK: P3.5 U1.9 | length 114.4
  GTL w8: v1(287,493.32) 288,494.32 344.67,494.32 P3.5
  GBL w8: U1.9@254.84,457.03 279.92,482.11 279.92,486.24 v1(287,493.32)
SD_CLK_DUT: P2.5 U1.19 | length 766.2
  GBL w8: P2.5 -448.14,346.46 -362.37,260.68 142.01,260.68 U1.19@183.85,302.53
SD_CLK_HUB: U1.13 U2.21 | length 529.8
  GBL w8: U1.13@296.6,372.13 348,423.52 348,451 371.65,474.65 371.65,530.87 450.78,610 511.25,610 575.25,546 625.96,546 U2.21
SD_CMD: P3.3 U1.4 | length 296.5
  GTL w8: v1(133.05,491.14) 198.82,491.14 287.01,402.95 P3.3
  GBL w8: v1(133.05,491.14) 133.05,480 U1.4@156.01,457.03
SD_CMD_DUT: P2.3 U1.20 | length 804
  GBL w8: P2.3 -457.68,433.07 -430.43,460.32 -78.4,460.32 -31.7,413.61 -31.7,412.41 104.02,276.68 130.17,276.68 U1.20@169.93,316.45
SD_CMD_HUB: U1.12 U2.24 | length 537.7
  GBL w8: U1.12@296.6,415.28 332,450.68 332,457.63 355.65,481.28 355.65,537.5 444.15,626 517.88,626 560.66,583.22 672.25,583.22 U2.24
SD_D0: P3.7 U1.6 | length 256.6
  GTL w8: v1(209,553) 209,551.35 231.85,528.5 253.09,528.5 267.62,543.03 267.62,554.62 289.18,576.18 P3.7
  GBL w8: U1.6@183.85,484.87 209,510.02 v1(209,553)
SD_D0_DUT: P2.7 U1.18 | length 786.8
  GBL w8: P2.7 -384.15,259.84 -368.99,244.68 169.16,244.68 U1.18@227,302.53
SD_D0_HUB: U1.14 U2.18 | length 559.9
  GBL w8: U1.14@282.69,358.21 285.76,358.21 285.76,352.06 291.33,346.48 307.42,346.48 322.25,361.31 322.25,375.14 364,416.9 364,444.37 388,468.37 388,471.06 387.65,471.41 387.65,524.24 457.41,594 504.63,594 577.66,520.97 577.66,510.78 U2.18 U2.18@588.43,500.02
SD_D1: P3.8 U1.7 | length 209.3
  GTL w8: v1(243.12,553.18) 242.86,553.18 309.18,619.49 P3.8
  GBL w8: U1.7@227,484.87 243.12,500.99 v1(243.12,553.18)
SD_D1_DUT: P2.8 U1.16 | length 913.8
  GBL w8: P2.8 -382.78,216.54 -370.63,228.68 8.63,228.68 49,188.32 171.88,188.32 272,288.44 272,313.21 U1.16@254.84,330.37
SD_D1_HUB: U1.15 U2.17 | length 549.7
  GBL w8: U1.15@268.76,344.29 290.21,322.83 313.98,322.83 338.25,347.1 338.25,368.52 380,410.27 380,437.75 404,461.75 404,477.69 403.65,478.04 403.65,517.61 464.04,578 498,578 561.66,514.34 561.66,498.95 U2.17
SD_D2: P3.1 U1.1 | length 357.4
  GTL w8: v1@85.19,442.74 v1(85.19,440.81) 209.65,316.34 P3.1
  GBL w8: v1(85.19,440.81) 88.72,440.81 U1.1@114.26,415.28
SD_D2_DUT: P2.1 U1.23 | length 737.6
  GBL w8: P2.1 -457.68,519.68 -430.31,492.32 -65.15,492.32 84.65,342.52 112.49,342.52 U1.23@128.18,358.21
SD_D2_HUB: U1.8 U2.33 | length 996.9
  GBL w8: U1.8@240.92,470.95 262,492.03 262,537.41 267.62,543.03 267.62,543.62 281.37,557.37 307.64,557.37 361.5,611.23 361.5,640.78 394.72,674 581.37,674 587.9,667.47 700.1,667.47 724.13,691.5 842.78,691.5 867,667.28 867,482.44 U2.33
SD_D3: P3.2 U1.3 | length 344.9
  GTL w8: v1(107.99,466.08) 200.26,466.08 306.7,359.64 P3.2
  GBL w8: v1(107.99,466.08) 119.13,466.08 U1.3@142.1,443.11
SD_D3_DUT: P2.2 U1.22 | length 741.1
  GBL w8: P2.2 -529.46,476.32 -71.78,476.32 78.02,326.52 124.33,326.52 U1.22@142.1,344.29
SD_D3_HUB: U1.10 U2.32 | length 938.2
  GBL w8: U1.10@268.76,443.12 284.65,459 287.33,459 323.33,495 323.33,550.43 377.5,604.6 377.5,634.15 401.35,658 574.75,658 581.27,651.47 706.73,651.47 730.75,675.5 836.15,675.5 851,660.65 851,494.28 U2.32
SD_MUX_SEL: P1.3 R7.2 U1.11 U1.21 | length 2237
  GTL w8: v1@743,730 v1(745,732)
  G1 w8: v1(114.17,301.18) 114.17,390.18 252.67,528.68 253.27,528.68 267.62,543.03 267.62,543.62 282,558 373.37,558 402,586.63 v1(402,624) ; v1(745,647) v1(745,732)
  GBL w8: v1(114.17,301.18) 126.83,301.18 U1.21@156.02,330.37 ; U1.11@282.68,429.2 304.18,450.7 304.18,452.44 339.65,487.9 339.65,544.12 402,606.47 v1(402,624) 420,642 568.12,642 574.65,635.47 713.35,635.47 724.88,647 v1(745,647) ; v1(745,732) 765.5,732 774,723.5 1064,723.5 R7.2 1107.5,711 1369,711 1413.57,666.43 1413.57,488.57 1368.7,443.7 P1.3
SD_NCD: P3.10 R12.2 U2.14 | length 710.2
  GTL w8: v1(462.6,363.19) 464.46,361.33 523.54,361.33 529.61,367.39 P3.10@754.92,367.39 ; P3.10@754.92,363.58 P3.10@754.92,367.39 ; P3.10@754.92,587.6 770,572.52 770,440 754.92,424.92 P3.10@754.92,367.39
  GBL w8: R12.2 440.9,341.49 v1(462.6,363.19) 462.6,391.93 517.52,446.85 530.24,446.85 U2.14
SDA: P4.3 R9.1 U2.10 U3.3 | length 1183.5
  G1 w8: v1(278.56,191.94) 288.3,191.94 312.36,216 312.36,451.73 453,592.37 P4.3
  GBL w8: v1(278.56,191.94) 280.32,191.94 U3.3 330.55,193.94 371.44,193.94 437.68,260.18 437.68,260.63 447.05,269.99 487.51,269.99 U2.10 ; R9.1 299.1,601 388.1,690 418,690 P4.3
USBDN_D2_N: J1.2 U2.1 | length 452.3
  GTL w8: v1(654.97,175.74) cw(c683.99,175.74) 663.47,196.26 677.99,210.79 cw(c722.76,166.02) 722.76,229.33 727.36,229.33 ccw(c727.36,290.79) 770.82,247.33 802.1,278.61 ccw(c759.16,321.54) 819.88,321.54 819.88,360.17 cw(c836.68,360.17) 824.8,372.05 833.75,380.99 cw(c843.5,371.23) 843.5,385.03 cw(c843.5,369.69) 854.35,380.54 880.56,354.33 J1.2
  GBL w8: v1(654.97,175.74) 654.97,177.87 cw(c678.86,177.87) 661.96,194.76 668.51,201.31 668.95,200.87 U2.1
USBDN_D2_P: J1.3 U2.2 | length 466.1
  GTL w8: v1(630.22,200.49) ccw(c630.22,229.51) 650.74,208.99 665.26,223.51 cw(c722.76,166.02) 722.76,247.33 727.36,247.33 ccw(c727.36,290.79) 758.09,260.06 789.37,291.34 ccw(c759.16,321.54) 801.88,321.54 801.88,360.17 cw(c836.68,360.17) 812.07,384.77 821.02,393.72 cw(c843.5,371.23) 843.5,403.03 ccw(c843.5,420.79) 856.06,408.23 880.9,433.07 J1.3
  GBL w8: v1(630.22,200.49) 632.34,200.49 ccw(c632.34,224.38) 649.24,207.49 655.03,213.28 ccw(c654.27,214.03) 655.03,214.79 U2.2
USBUP_D_N: P1.6 U2.43 | length 389.1
  GBL w8: U2.43 824.91,263.53 916,263.53 1026.12,373.66 1044.65,373.66 1074.6,343.7 P1.6
USBUP_D_P: P1.4 U2.42 | length 382.6
  GBL w8: U2.42 834.75,281.53 908.54,281.53 1070.71,443.7 P1.4
VBUS_DET: C3.2 J1.1 R2.2 R3.2 R4.1 R13.1 U2.39 | length 1524.3
  GTL w8: J1.1 1137.8,255.91 1384.84,502.95 v2(1384.84,633.86)
  GBL w8: U2.39 872.81,326.99 908.74,326.99 934.64,352.89 934.64,369.49 941.5,376.35 941.5,436.5 982.5,477.5 997.5,477.5 1032,512 1032,575 1041,584 1081,584 1135,638 C3.2 1147.25,674.25 1156.74,683.74 R4.1 R2.2 1342.13,658.5 1342.5,658.5 R13.1 1342.64,633.86 v2(1384.84,633.86)
VDD18PLL: C13.2 C14.2 U2.46 | length 226.2
  GBL w8: C14.2 717.46,77.22 779.62,139.37 779.62,225.31 U2.46
VUSB: R3.1
XTAL1: C1.1 R1.1 U2.45 Y1.1 | length 327.4
  GBL w8: U2.45 821.85,210.91 821.85,175.47 Y1.1 808.99,109.01 C1.1 ; 825.79,125 886.57,64.22 R1.1
XTAL2: C2.1 R1.2 U2.44 Y1.3 | length 342.3
  GBL w8: U2.44 833.24,227.36 904.53,227.36 945.69,186.2 945.69,183.07 ; R1.2 921.03,139.51 Y1.3 945.69,183.07 ; C2.1 960.15,183.07 945.69,183.07
pads on no net: U1.24 U2.3 U2.4 U2.6 U2.7 U2.8 U2.11 U2.19 U2.20 U2.22 U2.23 U2.29 U2.30 U2.31 U2.35 U2.36 U2.37 Y1.2

## Polygon pours and split planes (outlines as drawn)
D3V3 on G1 "D3V3_L02_P000" (solid, remove dead copper, pour order 0): 1456.69,787.4 -629.92,787.4 -629.92,0 1456.69,0
GND on GBL "GND_L04_P002" (solid, remove dead copper, pour order 2): 1456.69,787.4 -629.92,787.4 -629.92,0 1456.69,0
GND on GTL "GND_L01_P004" (solid, remove dead copper, pour order 4): 1456.69,787.4 -629.92,787.4 -629.92,0 1456.69,0
GND on GP1 (split plane): 195 vertices, not listed, extent -609.82,20.1 1436.6,767.3

## Keep-outs
Keep-Out Layer:
  lines w30: -424.53,563.66 cw(c-435.66,574.8) -435.66,559.05 ; -39.37,177.17 -598.43,177.17 cw(c-598.43,208.66) -629.92,208.66 ; -629.92,208.66 -629.92,208.66 ; -629.92,208.66 -629.92,527.56 cw(c-598.43,527.56) -598.43,559.06 -435.66,559.06 ; -435.66,559.05 -435.66,559.06
  lines w40: 318.6,787.4 685.6,787.4
  lines w50: 318.6,787.4 39.37,787.4 ccw(c39.37,748.03) 0,748.03 0,649.61 cw(c-39.37,649.61) -39.37,610.24 ; 685.6,787.4 1417.32,787.4 ; -424.53,563.66 -424.53,563.66 ; -424.53,563.66 -382.57,605.62 -382.57,605.63 cw(c-371.44,594.49) -371.44,610.24 ; -371.44,610.24 -371.44,610.24 ; -371.44,610.24 -322.83,610.24 ; -322.83,610.24 cw(c-322.83,606.3) -318.9,606.3 -318.9,590.55 ; -322.83,610.24 -322.83,610.24 ; -318.9,590.55 ccw(c-311.02,590.55) -311.02,582.68 -278.19,582.68 ; -318.9,590.55 -318.9,590.55 ; -278.19,582.67 ccw(c-278.19,598.42) -267.05,587.28 ; -278.19,582.67 -278.19,582.68 ; -267.05,587.28 -267.05,587.28 ; -267.05,587.28 -244.09,610.24 -39.37,610.24 ; -39.37,177.17 cw(c-39.37,137.8) 0,137.8 0,39.37 ; -39.37,177.17 -39.37,177.17 ; -39.37,610.24 -39.37,610.24 ; 0,39.37 ccw(c39.37,39.37) 39.37,0 1417.32,0 ; 0,39.37 0,39.37 ; 1417.32,0 ccw(c1417.32,39.37) 1456.69,39.37 ; 1417.32,0 1417.32,0 ; 1417.32,787.4 cw(c1417.32,748.03) 1456.69,748.03 ; 1417.32,787.4 1417.32,787.4 ; 1456.69,39.37 1456.69,748.03 ; 1456.69,39.37 1456.69,39.37 ; 1456.69,748.03 1456.69,748.03

## Silkscreen, mask and mechanical layers (free items; w line width, h text height)
GTO:
  lines w5: 776.57,416 776.57,535.78 ; 776.57,639.43 776.57,668.31 ; 889.76,213.76 889.76,134.84 976,134.84 ; 889.76,573.64 889.76,652.56 ; 1120.24,652.76 1433.45,652.76
GBO:
  text ".ProjectCode / REV .ProjectRevision" at 312.01,28.54 h55.12
Mechanical 1:
  lines w7.87: -318.9,590.55 ccw(c-311.02,590.55) -311.02,582.68
  lines w7.99: -629.92,208.66 ccw(c-598.43,208.66) -598.43,177.17 ; -629.92,527.56 cw(c-598.43,527.56) -598.43,559.06 ; -435.66,559.05 ccw(c-435.66,574.8) -424.53,563.66 ; -382.57,605.63 cw(c-371.44,594.49) -371.44,610.24 ; -322.83,610.24 cw(c-322.83,606.3) -318.9,606.3 ; -278.19,582.67 ccw(c-278.19,598.42) -267.05,587.28 ; -39.37,177.17 cw(c-39.37,137.8) 0,137.8 ; -39.37,610.24 ccw(c-39.37,649.61) 0,649.61 ; 0,39.37 ccw(c39.37,39.37) 39.37,0 ; 0,748.03 cw(c39.37,748.03) 39.37,787.4 ; 1417.32,0 ccw(c1417.32,39.37) 1456.69,39.37 ; 1417.32,787.4 cw(c1417.32,748.03) 1456.69,748.03
  lines w8: -629.92,208.66 -629.92,527.56 ; -598.43,177.17 -39.37,177.17 ; -598.43,559.06 -435.66,559.06 ; -424.53,563.66 -382.57,605.62 ; -371.44,610.24 -322.83,610.24 ; -318.9,590.55 -318.9,606.3 ; -311.02,582.68 -278.19,582.68 ; -267.05,587.28 -244.09,610.24 -39.37,610.24 ; 0,39.37 0,137.8 ; 0,649.61 0,748.03 ; 39.37,0 1417.32,0 ; 39.37,787.4 1417.32,787.4 ; 1456.69,39.37 1456.69,748.03
Mechanical 3:
  lines w7.87: -318.9,590.55 ccw(c-311.02,590.55) -311.02,582.68
  lines w7.99: -787.4,0 ccw(c-787.4,39.37) -748.03,39.37 ; -787.4,787.4 cw(c-787.4,748.03) -748.03,748.03 ; -629.92,208.66 ccw(c-598.43,208.66) -598.43,177.17 ; -629.92,527.56 cw(c-598.43,527.56) -598.43,559.06 ; -435.66,559.05 ccw(c-435.66,574.8) -424.53,563.66 ; -382.57,605.63 cw(c-371.44,594.49) -371.44,610.24 ; -322.83,610.24 cw(c-322.83,606.3) -318.9,606.3 ; -278.19,582.67 ccw(c-278.19,598.42) -267.05,587.28 ; -39.37,177.17 cw(c-39.37,137.8) 0,137.8 ; -39.37,610.24 ccw(c-39.37,649.61) 0,649.61 ; 0,39.37 ccw(c39.37,39.37) 39.37,0 ; 0,748.03 cw(c39.37,748.03) 39.37,787.4
  lines w8: -748.03,39.37 -748.03,748.03 ; -629.92,208.66 -629.92,527.56 ; -598.43,177.17 -39.37,177.17 ; -598.43,559.06 -435.66,559.06 ; -424.53,563.66 -382.57,605.62 ; -371.44,610.24 -322.83,610.24 ; -318.9,590.55 -318.9,606.3 ; -311.02,582.68 -278.19,582.68 ; -267.05,587.28 -244.09,610.24 -39.37,610.24 ; 0,39.37 0,137.8 ; 0,649.61 0,748.03 ; 39.37,0 59.06,0 cw(c59.06,-19.68) 78.74,-19.68 cw(c59.06,-19.68) 59.06,-39.37 -758.66,-39.37 -787.4,-39.37 cw(c-787.4,-19.68) -807.09,-19.68 cw(c-787.4,-19.68) -787.4,0 ; 39.37,787.4 59.06,787.4 ccw(c59.06,807.09) 78.74,807.09 ; -787.4,0 -787.4,0 ; -787.4,787.4 cw(c-787.4,807.09) -807.09,807.09 cw(c-787.4,807.09) -787.4,826.77 -758.66,826.77 39.37,826.77 59.06,826.77 cw(c59.06,807.09) 78.74,807.09 ; -787.4,787.4 -787.4,787.4 ; 78.74,807.09 78.74,807.09
Mechanical 10:
  lines w7.87: -318.9,590.55 ccw(c-311.02,590.55) -311.02,582.68
  lines w7.99: -787.4,0 ccw(c-787.4,39.37) -748.03,39.37 ; -787.4,787.4 cw(c-787.4,748.03) -748.03,748.03 ; -629.92,208.66 ccw(c-598.43,208.66) -598.43,177.17 ; -629.92,527.56 cw(c-598.43,527.56) -598.43,559.06 ; -435.66,559.05 ccw(c-435.66,574.8) -424.53,563.66 ; -382.57,605.63 cw(c-371.44,594.49) -371.44,610.24 ; -322.83,610.24 cw(c-322.83,606.3) -318.9,606.3 ; -278.19,582.67 ccw(c-278.19,598.42) -267.05,587.28 ; -39.37,177.17 cw(c-39.37,137.8) 0,137.8 ; -39.37,610.24 ccw(c-39.37,649.61) 0,649.61 ; 0,39.37 ccw(c39.37,39.37) 39.37,0 ; 0,748.03 cw(c39.37,748.03) 39.37,787.4
  lines w8: -748.03,39.37 -748.03,748.03 ; -629.92,208.66 -629.92,216.54 -629.92,527.56 ; -598.43,177.17 -39.37,177.17 ; -598.43,559.06 -435.66,559.06 ; -424.53,563.66 -382.57,605.62 ; -371.44,610.24 -322.83,610.24 ; -318.9,590.55 -318.9,606.3 ; -311.02,582.68 -278.19,582.68 ; -267.05,587.28 -244.09,610.24 -39.37,610.24 ; 0,39.37 0,137.8 ; 0,649.61 0,748.03 ; 39.37,0 59.06,0 cw(c59.06,-19.68) 78.74,-19.68 cw(c59.06,-19.69) 59.06,-39.37 -758.66,-39.37 -787.4,-39.37 cw(c-787.4,-19.69) -807.09,-19.69 cw(c-787.4,-19.69) -787.4,0 ; 39.37,787.4 59.06,787.4 ccw(c59.06,807.09) 78.74,807.09 ; -787.4,0 -787.4,0 ; -787.4,787.4 cw(c-787.4,807.09) -807.09,807.09 cw(c-787.4,807.09) -787.4,826.77 -758.66,826.77 39.37,826.77 59.06,826.77 cw(c59.06,807.09) 78.74,807.09 ; -787.4,787.4 -787.4,787.4 ; 78.74,807.09 78.74,807.09
Mechanical 32:
  lines w10: -885.83,393.7 1692.91,393.7

## Text inside footprints (layer, text, board x,y; h text height)
J1: GTO "4" at 955.51,572.84 h31.5 r90; GTO "1" at 961.41,200.79 h31.5 r90